# Altium PCB dc_dc_buck_converter.PcbDoc
Units mm, origin at the board's own origin, x right, y up, seen from the top; angles counter-clockwise.
Board outline 38.77 x 21.02 mm, 2 copper layers (Top Layer, Bottom Layer), stack 0.325 mm thick; 13 components, 6 nets, 34 pads, 0 vias.
Unrouted connection lines stored in the file: 14.
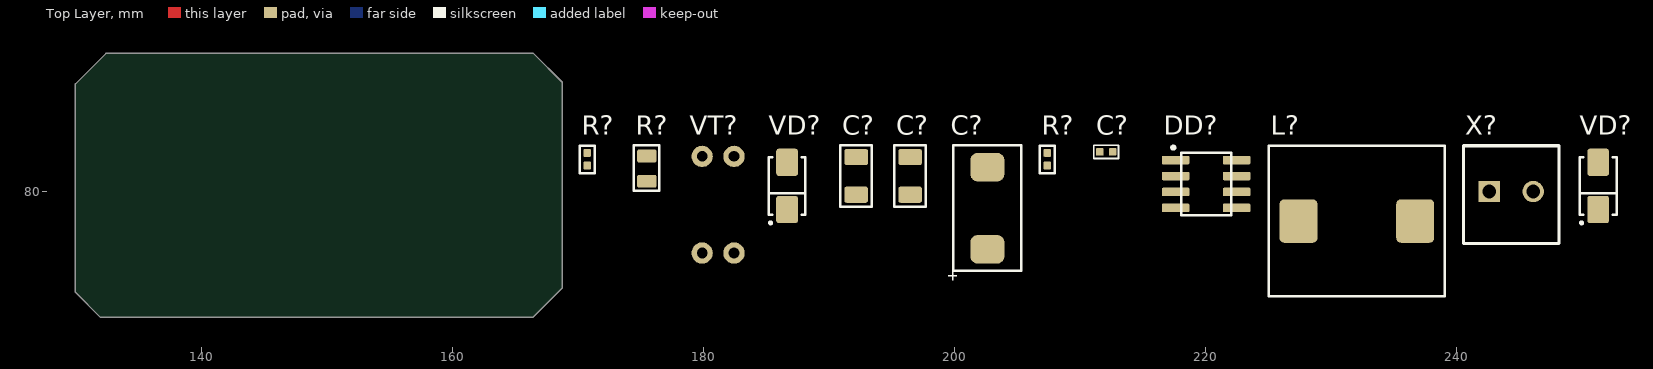
[diagram p0: Top Layer view]
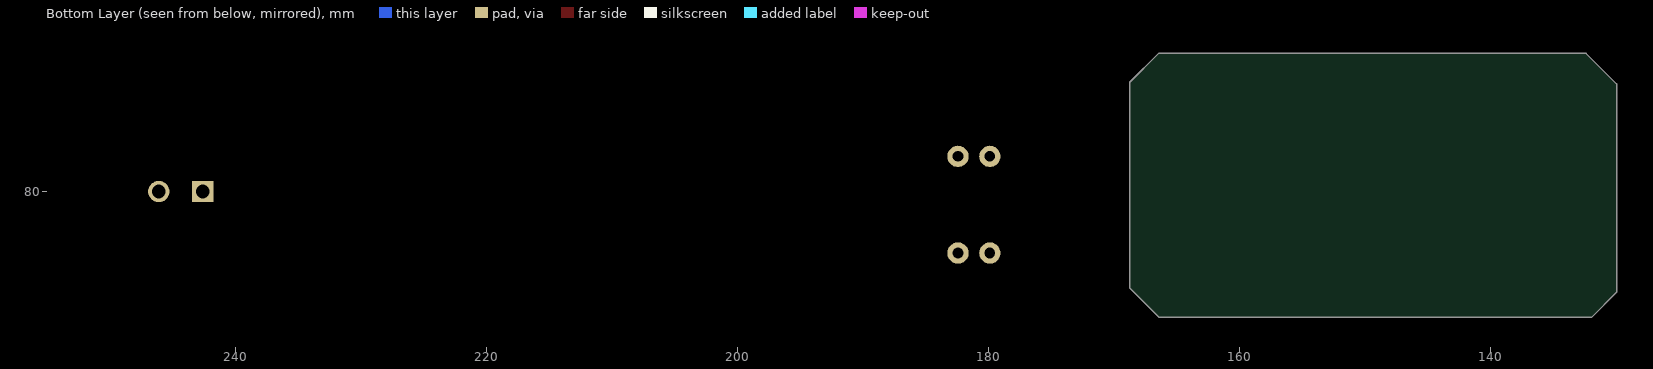
[diagram p1: Bottom Layer view, seen from below]

## Layer stack, top to bottom
Top Solder: solder mask 0.0102, Solder Resist, Dk 3.5
Top Layer: signal copper 0.0356
Dielectric 1: core 0.254, FR-4, Dk 4.2
Bottom Layer: signal copper 0.0356
Bottom Solder: solder mask 0.0102, Solder Resist, Dk 3.5

## Board outline
130,72 132,70 166.415,70 168.772,72.357 168.772,88.728 166.475,91.025 132.425,91.025 130,88.6

## Design rules (kind name [scope] priority, off if disabled: settings)
Clearance Clearance_power [InNet('+5В_USB') vs InNet('GND')] p1: gap=0.4 ignorepadtopadclearanceinfootprint=FALSE
Clearance Clearance_power_1 [InNet('X2_VCC') vs InNet('GND')] p2: gap=0.4 ignorepadtopadclearanceinfootprint=FALSE
Clearance Clearance_power_VDD [InNet('NetVD2_1') vs InNet('GND')] p3: gap=0.4 ignorepadtopadclearanceinfootprint=FALSE
Clearance Clearance_power3.3 [InNet('+3,3В') vs InNet('GND')] p4: gap=0.4 ignorepadtopadclearanceinfootprint=FALSE
Clearance [All] p5: gap=0.2 ignorepadtopadclearanceinfootprint=FALSE except(0.4: THPad-THPad THPad-Fill THPad-Poly THPad-Region; 0.6: Arc-THPad Track-THPad)
ComponentClearance [All] p1: gap=0.3 collisioncheckmode=3 verticalgap=0.01 showdistances=FALSE
MinimumSolderMaskSliver [All] p1: minsoldermaskwidth=0.05
PolygonConnect PolygonConnect_via [IsVia] p1: connectstyle=Direct reliefconductorwidth=0.254 reliefentries=4 polygonreliefangle="90 Angle" airgapwidth=0.254
PolygonConnect [All] p2: connectstyle=Relief reliefconductorwidth=0.6 reliefentries=4 polygonreliefangle="90 Angle" airgapwidth=0.2
RoomDefinition dc_dc_buck_converter [InComponentClass('dc_dc_buck_converter')] p1: confinementstyle=ConfineIn formatcopy=TRUE lockcomponents=FALSE outline 169.908,71.428 254.287,71.428 254.287,86.479 169.908,86.479
RoutingVias [All] p1: holewidth=0.3 width=0.7 viastyle="Through Hole" minholewidth=0.3 minwidth=0.7 maxholewidth=0.3 maxwidth=0.7
SilkToSolderMaskClearance [IsPad] p1: minsilkscreentomaskgap=0 clearancetoexposedcopper=TRUE
SolderMaskExpansion [All] p1: expansion=0.102
Width [All] p1: maxlimit=3 minlimit=0.2 preferedwidth=0.2 minimp=50.000000 maximp=50.000000 favimp=50.000000
27 further rules are at their usual default settings.

## Classes and differential pairs
component class dc_dc_buck_converter: C? DD? L? R? VD? VT? X?

## Components (designator, comment, footprint, x,y, rotation, side; value= is the part's Value field where it differs from the comment)
C? "Capacitor" C0402 211.585,83.204 r0 top value=0,01мк
C? "Capacitor_pol" "TANTAL CASE E" 202.635,78.704 r90 top value=100мк
C? "Capacitor" C1206 196.46,81.304 r90 top value=4,7мк
C? "Capacitor" C1206 192.159,81.304 r90 top value=4,7мк
DD? "TPS5420" SO8 220.061,80.629 r0 top
L? "Inductor" L4040 232.061,77.679 r0 top value=33мкГн
R? "Resistor_0,125Вт" R0805 175.509,81.854 r90 top value=100к
R? "Resistor_0,062Вт" R0402 170.758,82.604 r90 top value=3,3к
R? "Resistor_0,062Вт" R0402 207.41,82.604 r90 top value=10к
VD? "DiodeSchottky" SMA 251.287,80.479 r90 top
VD? "DiodeSchottky" SMA 186.684,80.479 r90 top
VT? "P-MOSFET" HD-1 181.184,78.979 r90 top
X? "Вход питания 12В" "TERMINAL 2 way-3.5mm" 244.362,80.029 r0 top

## Footprints (in the part's own frame and the unit in brackets; to place one, negate y for a bottom-side part, rotate by r counter-clockwise, add the part's x,y. Pads: shape width x height; smd on the part's side, far side on the other; paste and mask are expansions set on the pad)
C0402 [mm]
  rrect25% 0.59x0.6 smd: 1(0,-0.02) 2(1.025,-0.02)
  silkscreen extent -0.48,-0.55 1.48,0.51, body extent 0.01,-0.25 1.01,0.25, height 0.48
C1206 [mm]
  rrect25% 1.28x1.87 smd: 1(-1.528,-0.024) 2(1.472,-0.024)
  silkscreen extent -2.47,-1.25 2.4,1.22, body extent -1.6,-0.85 1.6,0.85, height 1.75
HD-1 [mm]
  round 1.7 hole 0.85: 1(3.85,-1.27) 2(3.85,1.27) 3(-3.85,-1.27) 3(-3.85,1.27)
  body extent -4.01,-2.5 4.01,2.5, height 6.7
L4040 [mm]
  rrect25% 3.02x3.46 smd paste-5: 1(-4.645,0) 2(4.65,0)
  silkscreen extent -7,-6 7,6, body extent -5.35,-5.11 5.27,5.11, height 3.78
R0402 [mm]
  rrect25% 0.61x0.6 smd: 1(-0.5,0) 2(0.5,0)
  silkscreen extent -1.1,-0.6 1.07,0.6, body extent -0.55,-0.25 0.45,0.25, height 0.35
R0805 [mm] "Chip Resistor, 2-Leads, Body 2,10x1,30mm, IPC Medium Density"
  rrect25% 1.02x1.53 smd paste-5: 1(-1.008,0) 2(1.008,0)
  silkscreen extent -1.78,-1 1.85,1.02, body extent -1.1,-0.7 1.1,0.7, height 0.55
SMA [mm]
  rrect25% 2.17x1.74 smd: 1(-1.88,0) 2(1.88,0)
  silkscreen extent -3.04,-1.46 2.29,1.46, body extent -2.5,-1.35 2.5,1.35, height 2.15
SO8 [mm]
  rrect25% 2.17x0.68 smd: 1(-2.43,1.905) 2(-2.43,0.635) 3(-2.43,-0.635) 4(-2.43,-1.905) 5(2.43,-1.905) 6(2.43,-0.635) 7(2.43,0.635) 8(2.43,1.905)
  silkscreen extent -2.74,-2.5 2,3.02, body extent -3,-2.54 3,2.54, height 1.7
"TANTAL CASE E" [mm] "Конденсатор электролитический танталовый SMD"
  rrect50% 2.27x2.72 smd: 1(-3.275,0) 2(3.275,0)
  silkscreen extent -5.75,-2.7 5,3.12, body extent -3.65,-2.15 3.65,2.15, height 4.5
"TERMINAL 2 way-3.5mm" [mm]
  rect 1.7x1.7 hole 1.1: 1(-1.75,0)
  round 1.7 hole 1.1: 2(1.75,0)
  silkscreen extent -3.8,-4.15 3.8,3.65, body extent -3.56,-3.89 3.56,3.4, height 8.51

## Part data
C?: library part cap42, "Конденсатор", Manufacture=Murata, Part Name=Capacitors, Part Number=GRM155R71H103K, Voltage=50B, id=cap42, TKE=X7R
C?: library part cap197, "Конденсатор полярный", Manufacture=Murata, Part Name=Polimer, Part Number=ECASD91B107M012K00, Voltage=12,5В, id=cap197, TKE=12mOhm
C? C?: library part cap189, "Конденсатор", Manufacture=Murata, Part Name=Capacitors, Part Number=GRM31CR71H475KA12L, Voltage=50В, id=cap189, TKE=X7R
DD?: library part pwr13, "2-A, WIDE INPUT RANGE, STEP-DOWN CONVERTER", Current=2A, Input Voltage="5,5 - 36B", Manufacturer="Texas Instruments", Output Voltage=Adj, Part Name="Step-Down Converter", id=pwr13, Part Number=TPS5420, Type=Impulse
L?: library part ind8, "EMI Suppression Filter", Manufacture=Vishay, Part Number=IHLP4040DZER330M11, Rated Current=4A, Resistance=94,5mOhm, id=ind8, Part Name=Inductor
R?: library part res121, "Резистор", Manufacture=Yageo, Part Name=Resistor, Part Number=RC0805FR-07100KL, Power=0,125Вт, Accuracy=1%, id=res121
R?: library part res278, "Резистор", Manufacture=Yageo, Part Name=Resistor, Part Number=RC0402FR-072K3, Power=0,062Вт, Accuracy=1%, id=res278
R?: library part res290, "Резистор", Manufacture=Yageo, Part Name=Resistor, Part Number=RC0402FR-0710KL, Power=0,062Вт, Accuracy=1%, id=res290
VD? VD?: library part diode2, "Диод Шоттки", Forward Current=3A, Forward Voltage=0,55B, Manufacture="Taiwan Semiconductor", Max Reverse Voltage=40B, Part Name="Diode Schottky", Part Number=SK34A, id=diode2
VT?: library part trans1, "N-MOSFET", Continuous drain current=2,5A, Gate-to-source voltage=(+-)20B, Manufacturer=Vishay, Part Name=Transistor, Part Number=IRFD9024PBF, Power dissipation=1,3W, Pulsed drain current=20A, id=trans1, Rds=0,28Ohm, Structure=p-channel, V drain-source max=(-60B)
X?: library part connect34, "Разъем - 2 конт. клеммник", Part Name="TERMINAL BLOCK 2 way", Contact_1=+12В, Contact_2=GND, Etch=3.5mm, id=connect34

## Nets (pads, with @x,y where several pads share a name; then routed paths per layer and width w, separated by ;. In a path a pad name is that pad's centre, name@x,y a point inside that pad or via, vN(x,y) a via of type N, cw(c..) or ccw(c..) an arc to the next point about the centre after c; other vN are vias at no path point)
GND: C?.1@192.183,79.776 C?.1@196.484,79.776 DD?.6 R?.1@170.758,82.104 R?.1@175.509,80.846 X?.2
NetC?_1: C?.1@202.635,75.429 L?.2 R?.2@207.41,83.104
NetC?_2: C?.2@212.61,83.184 DD?.1 DD?.8
NetDD?_4: DD?.4 R?.1@207.41,82.104 R?.2@170.758,83.104
NetR?_2: R?.2@175.509,82.861 VT?.1
NetVT?_3: VT?.3 X?.1
pads on no net: C?.1@211.585,83.184 C?.2@192.183,82.776 C?.2@196.484,82.776 C?.2@202.635,81.979 DD?.2 DD?.3 DD?.5 DD?.7 L?.1 VD?.1 VD?.2 VT?.2